# Altium PCB 3043-1-1532_Rev01.PcbDoc (part 2 of 2)
Units mm, origin at the board's own origin, x right, y up, seen from the top; angles counter-clockwise.
Board outline 98 x 98 mm, 4 copper layers (Top Layer, MidLayer1, MidLayer2, Bottom Layer); 167 components, 124 nets, 549 pads, 217 vias.
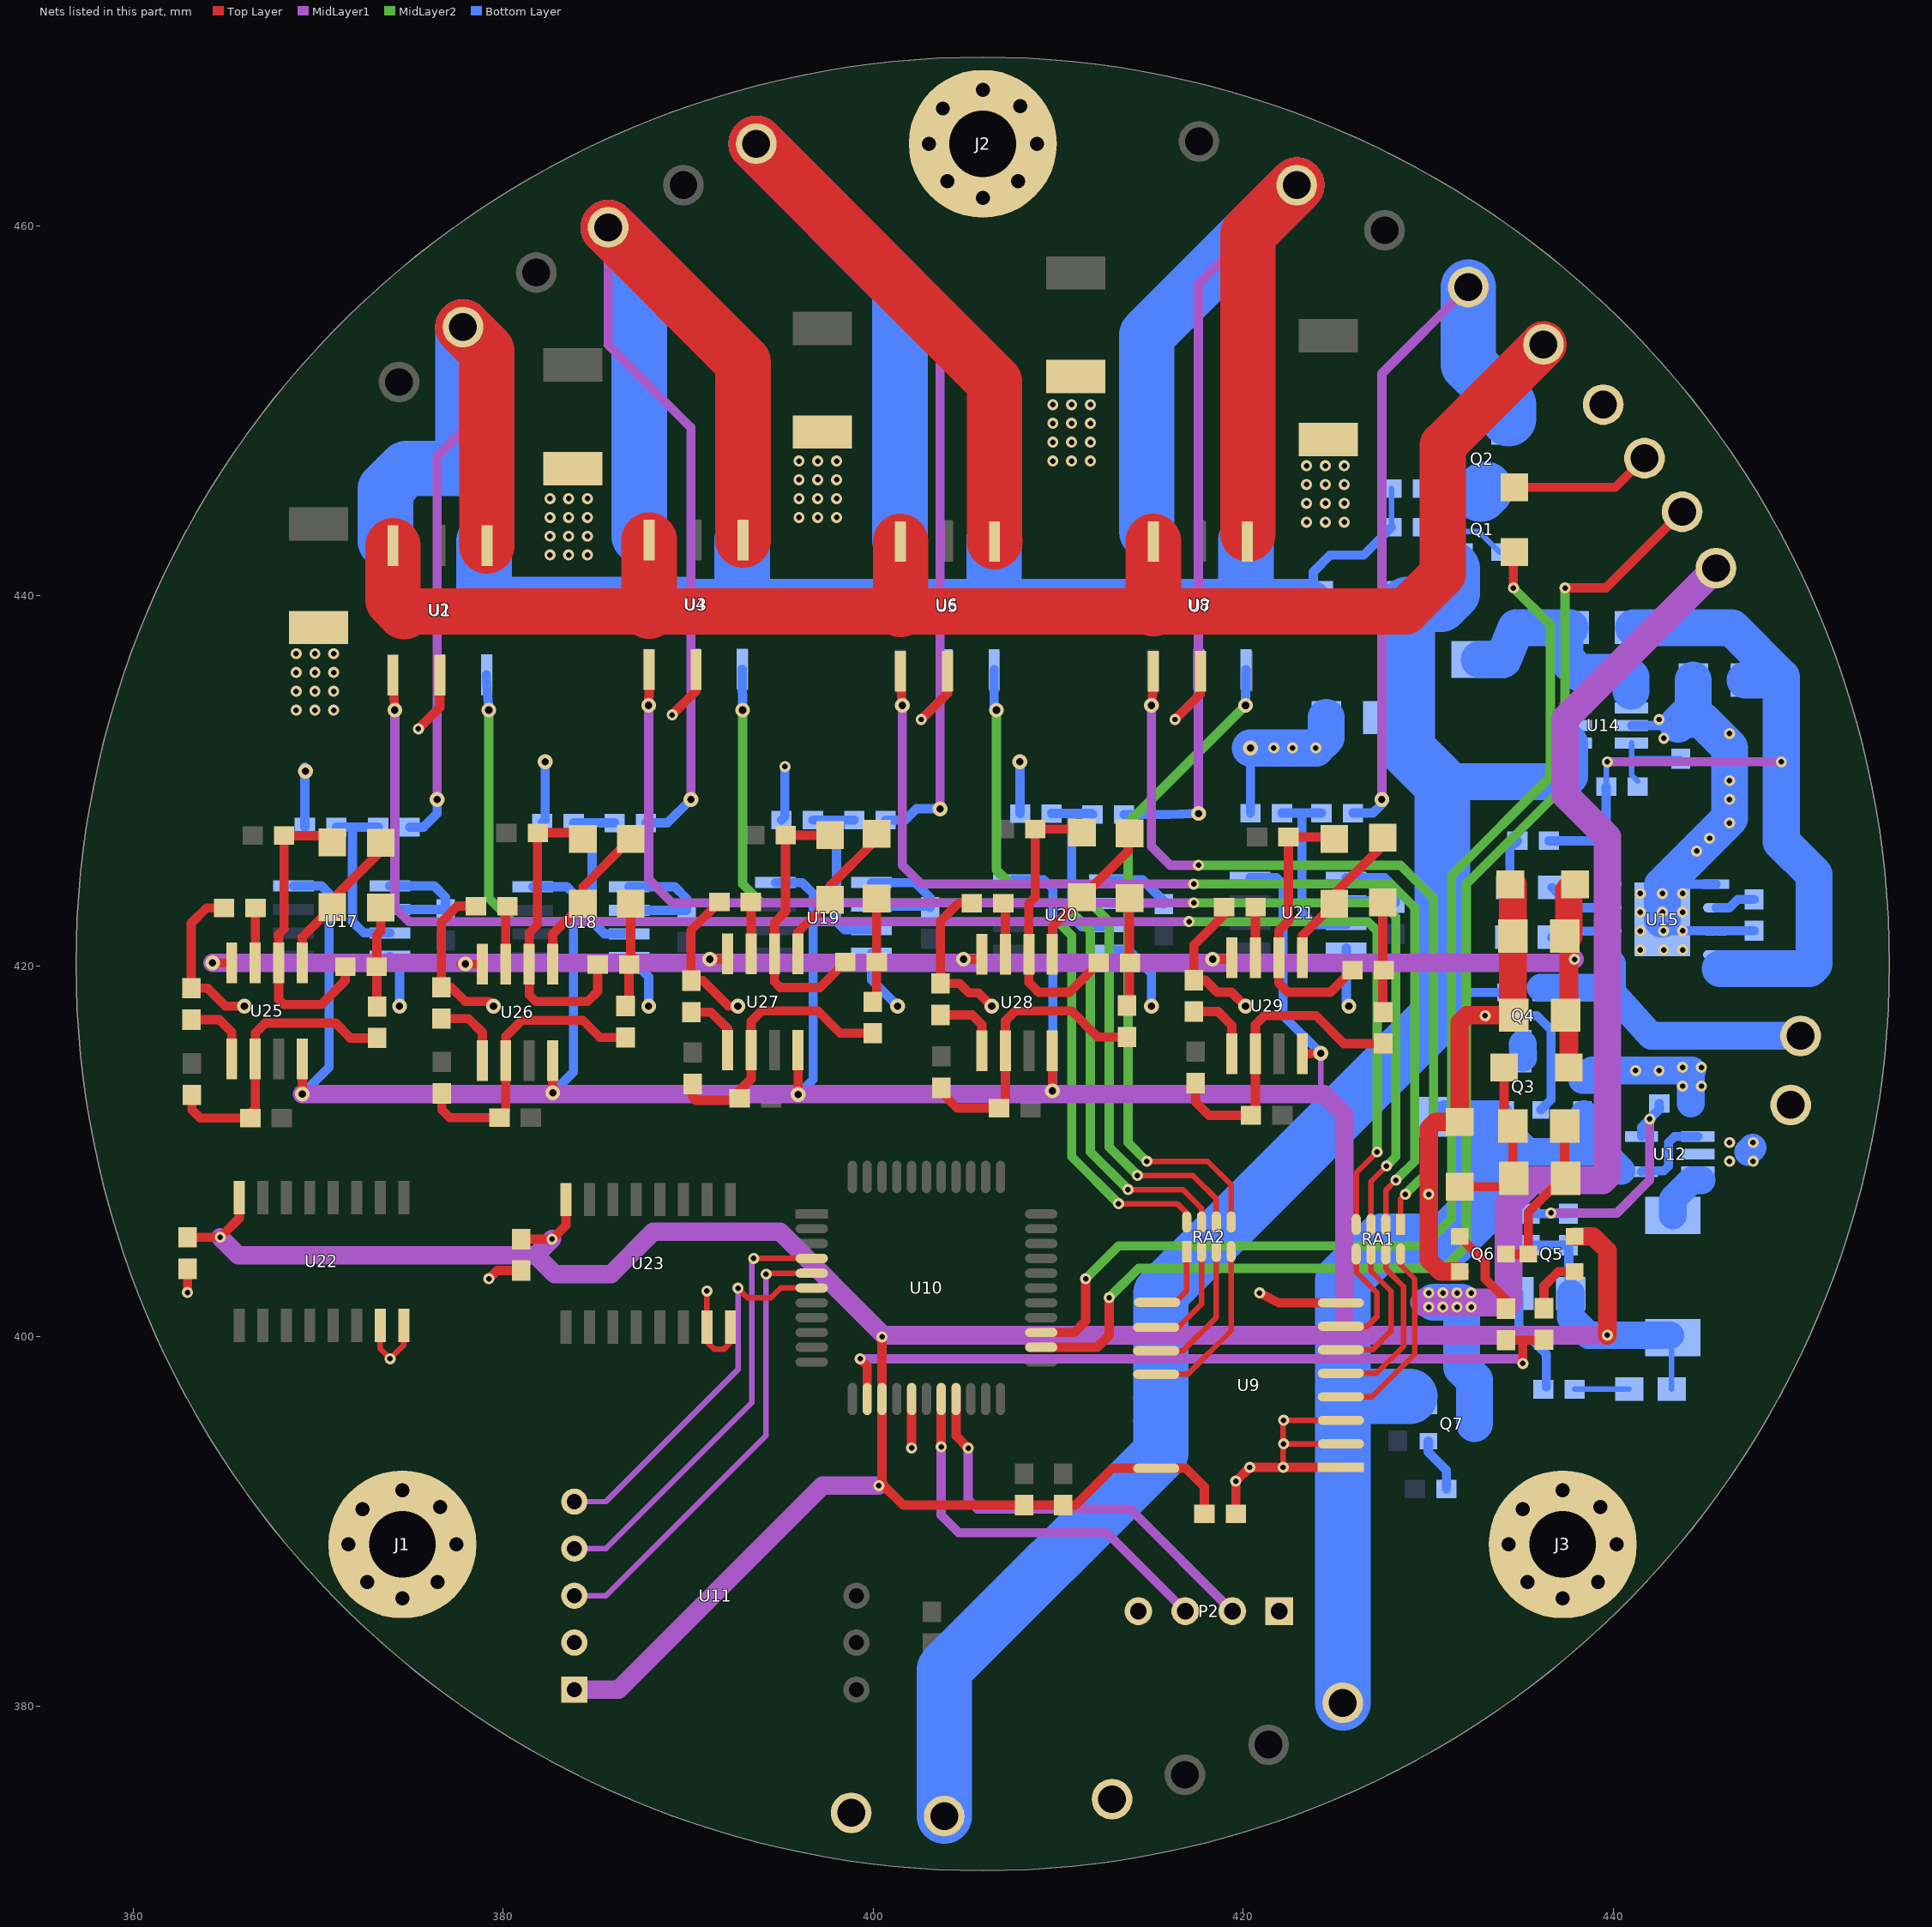
[diagram p4: the nets of this part, all layers, seen from the top]

## Via types
v1: diameter 0.6, hole 0.3, Top Layer to Bottom Layer, 175 vias
v2: diameter 0.8, hole 0.4, Top Layer to Bottom Layer, 42 vias

## Nets (pads, with @x,y where several pads share a name; then routed paths per layer and width w, separated by ;. In a path a pad name is that pad's centre, name@x,y a point inside that pad or via, vN(x,y) a via of type N, cw(c..) or ccw(c..) an arc to the next point about the centre after c; other vN are vias at no path point) (continued)
GND: -BATT.1 -CHG.1 -VOUT.1 C1.2 C2.2 C3.2 C5.2 C6.2 C9.2 C10.2 C11.2 C12.2 D5.2 D6.2 G.1 J1.1 J2.1 J3.1 P2.1 P2.4 Q6.2 R3.2 R4.2 R5.2 R6.2 R7.2 R12.2 R13.1 R15.2 R17.2 R28.1 R29.1 R34.1 R35.1 R38.1 R49.2 R50.2 R51.2 R52.2 R63.2 R64.2 R65.2 R66.2 R72.2 R73.2 U1.2 U2.2 U3.2 U4.2 U5.2 U6.2 U7.2 U8.2 U9.1 U9.2 U9.3 U9.8 U10.16 U11.2 U12.2 U14.2 U15.1 U15.3 U15.9 U17.4 U18.4 U19.4 U20.4 U21.4 U22.7 U22.8 U23.7 U23.8 | length 212.3
  Top Layer w0.3: U22.7@373.355,400.588 373.355,399.313 v1(373.888,398.78) 374.625,399.517 U22.8@374.625,400.588 ; v1(391.008,402.438) 391.008,399.694 391.414,399.288 391.922,399.288 392.278,399.644 U23.8@392.278,400.486 ; v1(422.148,392.913) v1@422.148,395.478 ; v1(422.173,394.183) U9.2@425.272,394.183 ; v1(422.173,395.453) U9.3@425.272,395.453
  Top Layer w0.5: v1(362.941,402.361) C11.2@362.941,403.645 ; R49.2@364.91,423.136 363.957,423.136 363.144,422.323 R51.2@363.144,418.804 364.024,418.804 364.998,417.83 v2(366.014,417.83) ; v1(375.412,432.816) 376.58,433.984 U1.2@376.58,435.712 ; R50.2@378.524,423.24 377.52,423.24 376.657,422.377 R52.2@376.657,418.858 377.178,418.858 377.952,418.084 379.222,418.084 v2(379.476,417.83) ; v1(379.222,403.098) 379.667,403.543 C12.2@380.975,403.543 ; v1(389.128,433.578) 390.423,434.873 U3.2@390.423,436.016 ; R65.2@390.144,419.1 390.144,421.931 R63.2@391.682,423.469 ; R65.2@390.169,419.213 390.793,419.213 392.176,417.83 v2(392.684,417.83) ; v1(402.072,393.964) U10.16@402.072,396.603 ; v1(402.59,433.324) 404.012,434.746 U5.2@404.012,435.94 ; R64.2@405.321,423.393 404.597,423.393 403.631,422.427 R66.2@403.631,419.061 404.661,419.061 405.169,418.553 405.677,418.553 v2(406.4,417.83) ; v1(416.306,433.324) 417.678,434.696 U7.2@417.678,435.94 ; R72.2@418.961,423.189 418.961,422.771 417.322,421.132 R73.2@417.322,419.239 417.945,419.239 418.592,418.592 419.354,418.592 v2(420.116,417.83) ; C1.2@419.594,390.398 v1(419.594,392.162) v1(420.345,392.913) U9.1@425.272,392.913 ; v1(420.878,402.336) 421.919,401.803 U9.8@425.272,401.803 ; C9.2@434.613,417.347 434.643,417.377 C9.2@434.643,417.398 ; C10.2@434.643,421.615 434.643,422.986
  Top Layer w1: Q6.2@431.693,403.482 430.654,403.482 430.022,404.114 430.022,411.226 430.375,411.579 D6.2@431.698,411.579 431.698,416.966 432.079,417.347 C9.2@434.613,417.347
  Top Layer w1.5: C9.2@434.563,417.398 D5.2@434.563,424.403
  Bottom Layer w0.5: R28.1@369.279,427.507 369.279,430.747 v2(369.316,430.53) ; U17.4@373.872,420.524 374.396,420 v2(374.396,417.83) ; v1(375.412,432.816) 376.555,433.959 U2.2@376.555,435.737 ; R29.1@382.106,427.736 382.27,427.9 v2(382.27,431.038) ; U18.4@386.8,420.472 387.858,419.414 v2(387.858,417.83) ; v1(389.128,433.578) 390.373,434.823 U4.2@390.373,436.042 ; R34.1@395.034,427.888 395.224,428.078 v1(395.224,430.784) ; U19.4@399.907,420.7 399.907,419.243 v2(401.32,417.83) ; v1(402.59,433.324) 403.987,434.721 U6.2@403.987,436.016 ; v2(407.924,431.038) 407.924,428.258 R35.1@407.938,428.244 ; U20.4@412.759,420.853 413.791,420.853 415.036,419.608 v2(415.036,417.83) ; v1(416.306,433.324) 417.601,434.619 U8.2@417.601,436.016 ; R38.1@420.384,428.269 v2(420.384,431.786) ; U21.4@425.561,420.98 425.561,417.973 v2(425.704,417.83) ; C3.2@434.893,402.311 434.893,400.513 436.372,399.034 R13.1@436.372,397.256 ; U14.2@440.981,433.004 443.536,433.004 R15.2@443.636,432.904 ; U15.9@442.468,422.148 v1(442.708,421.908) U15.3@445.546,421.908 ; U15.9@442.771,424.483 442.827,424.427 U15.1@445.546,424.427 ; U15.3@445.546,421.887 445.566,421.908 R17.2@447.599,421.908
  Bottom Layer w1.5: C2.2@438.746,413.854 C2.2@438.328,413.854 438.824,414.35 444.246,414.35 444.182,414.286 R12.2@444.182,412.572 ; 447.294,409.956 v1@447.523,410.185
  Bottom Layer w2: v2(420.384,431.786) v1(423.912,431.786) 424.479,432.353 C5.2@424.479,433.426 ; U15.9@442.646,422.522 442.646,424.358 446.278,427.99 446.278,431.8 444.754,433.324 444.246,433.324 ; R15.2@443.484,433.07 444.316,433.902 C6.2@444.316,435.458
  other v1: 430.022,407.67 446.278,409.448 447.548,409.448 446.278,410.464 447.548,410.464 443.738,413.512 444.754,413.512 441.198,414.35 442.468,414.35 443.738,414.528 444.754,414.528 433.07,417.322 441.452,420.878 442.722,420.878 443.738,420.878 441.452,421.894 443.738,421.908 441.452,422.91 442.646,422.91 443.738,422.91 441.452,423.926 442.646,423.926 443.738,423.926 444.5,426.212 445.193,426.905 446.278,427.736 446.278,429.006 446.278,430.022 421.64,431.786 422.656,431.786 442.722,432.308 446.278,432.562 442.468,433.324 368.808,433.832 369.824,433.832 370.84,433.832 368.808,434.848 369.824,434.848 370.84,434.848 368.808,435.864 369.824,435.864 370.84,435.864 368.808,436.88 369.824,436.88 370.84,436.88 382.524,442.214 383.54,442.214 384.556,442.214 382.524,443.23 383.54,443.23 384.556,443.23 423.418,443.992 424.434,443.992 425.45,443.992 382.524,444.246 383.54,444.246 384.556,444.246 395.986,444.246 397.002,444.246 398.018,444.246 423.418,445.008 424.434,445.008 425.45,445.008 382.524,445.262 383.54,445.262 384.556,445.262 395.986,445.262 397.002,445.262 398.018,445.262 423.418,446.024 424.434,446.024 425.45,446.024 395.986,446.278 397.002,446.278 398.018,446.278 423.418,447.04 424.434,447.04 425.45,447.04 395.986,447.294 397.002,447.294 398.018,447.294 409.702,447.294 410.718,447.294 411.734,447.294 409.702,448.31 410.718,448.31 411.734,448.31 409.702,449.326 410.718,449.326 411.734,449.326 409.702,450.342 410.718,450.342 411.734,450.342
MCU_485CON: U10.6 U11.5 | length 20.6
  Top Layer w0.3: v1(392.684,402.59) 393.192,402.082 394.462,402.082 394.983,402.603 U10.6@396.672,402.603
  MidLayer1 w0.3: U11.5@383.845,391.058 385.547,391.058 392.684,398.196 v1(392.684,402.59)
MCU_RXD: P2.3 U10.18 | length 21.6
  Top Layer w0.5: v1(403.672,394.02) U10.18@403.672,396.603
  MidLayer1 w0.5: v1(403.672,394.02) 403.672,390.332 404.622,389.382 412.623,389.382 P2.3@416.865,385.14
MCU_RXD2: U10.4 U11.4 | length 23.8
  Top Layer w0.3: v1(393.535,404.203) U10.4@396.672,404.203
  MidLayer1 w0.3: U11.4@383.845,388.518 385.547,388.518 393.446,396.418 393.446,404.114 v1(393.535,404.203)
MCU_RXD_2: RxD.1 U10.24 | length 72.2
  Top Layer w0.5: U10.24@409.072,399.403 412.103,399.403 412.75,400.05 v1(412.75,402.082) ; v1(437.388,440.436) 439.598,440.436 RxD.1@443.713,444.551
  MidLayer2 w0.5: v1(412.75,402.082) 414.336,403.668 430.846,403.668 432.054,404.876 432.054,424.434 437.388,429.768 v1(437.388,440.436)
MCU_TXD: P2.2 U10.19 | length 22.5
  Top Layer w0.5: U10.19@404.472,396.603 404.472,394.612 v1(405.13,393.954)
  MidLayer1 w0.5: v1(405.13,393.954) 405.13,391.16 405.638,390.652 413.893,390.652 P2.2@419.405,385.14
MCU_TXD2: U10.5 U11.3 | length 25.1
  Top Layer w0.3: v1(394.208,403.352) 394.259,403.403 U10.5@396.672,403.403
  MidLayer1 w0.3: U11.3@383.845,385.978 385.547,385.978 394.208,394.64 v1(394.208,403.352)
MCU_TXD_2: D17.2 TxD.1 | length 7.7
  Top Layer w0.5: D17.2@434.645,445.869 440.103,445.869 TxD.1@441.681,447.446
NEGA_PWM: R20.2 R22.2 U10.13 | length 41.5
  Top Layer w0.5: v1(399.288,398.78) 399.672,398.396 U10.13@399.672,396.603 ; R22.2@434.188,399.784 R20.2@436.22,399.784 ; v1(435.102,398.526) 435.102,399.784
  MidLayer1 w0.5: v1(399.288,398.78) 434.848,398.78 v1(435.102,398.526)
Net+BATT_1: +BATT.1 Q4.2 U15.5 | length 17
  Bottom Layer w1.5: Q4.2@436.077,418.826 439.694,418.826 442.036,416.23 +BATT.1@450.113,416.23 ; 439.922,418.344 439.922,420.122
NetC4_2: C4.2 R11.2 R12.1 U12.5 | length 13.6
  MidLayer1 w0.5: v1(436.626,406.654) 440.182,406.654 441.96,408.432 v1(441.96,411.734)
  Bottom Layer w0.5: C4.2@435.508,406.615 R11.2@437.566,406.615 ; U12.5@441.514,410.79 441.514,411.288 442.482,412.256 R12.1@442.482,412.572
NetC6_1: C6.1 D3.2 R14.1 R16.1 U15.4 U15.8 | length 51.3
  MidLayer1 w0.5: v1(439.674,431.038) v1(449.072,431.038)
  Bottom Layer w0.3: R14.1@439.611,429.997 439.611,430.975 v1(439.674,431.038)
  Bottom Layer w0.5: R16.1@436.511,426.771 439.115,426.771 439.746,426.14 U15.8@439.746,424.427 ; 439.611,426.275 R14.1@439.611,429.692
  Bottom Layer w2: D3.2@441.085,438.288 446.394,438.288 449.072,435.61 449.072,426.72 450.85,424.942 450.85,420.116 450.596,419.862 445.77,419.862 ; C6.1@447.116,435.458 448.716,435.458 448.818,435.356
NetC7_1: C7.1 C8.1 Q5.3 Q6.3 | length 8.9
  Top Layer w0.5: Q6.3@434.193,404.432 Q5.3@435.389,404.432 ; Q5.3@435.401,404.444 435.401,406.699 437.236,408.534 437.363,408.661 C8.1@437.363,411.353
NetC7_2: C7.2 C8.2 D4.2 D6.1 | length 9.3
  Top Layer w0.5: D6.1@431.698,408.079 434.241,408.079 434.563,408.401 C8.2@434.563,411.353 434.089,411.827 D4.2@434.089,414.528
NetD1_1: D1.1 R1.2 R2.2 U2.6 U4.6 U6.6 U8.6 | length 68.7
  Bottom Layer w0.3: D1.1@423.774,439.547 D1.1@423.774,440.69 ; R1.2@428.004,443.713 R2.2@428.004,445.795
  Bottom Layer w0.5: D1.1@423.774,440.69 423.774,441.3 424.688,442.214 426.505,442.214 R1.2@428.004,443.713
  Bottom Layer w3: U2.6@378.968,442.976 378.968,439.928 379.476,439.42 ; 379.359,439.537 389.773,439.537 ; 387.604,439.42 D1.1@423.418,439.42 ; 392.913,439.699 U4.6@392.913,443.042 ; 406.527,439.801 U6.6@406.527,443.016 ; 420.141,439.903 U8.6@420.141,443.016
NetD3_1: D3.1 L2.2 U14.1 | length 12.5
  Bottom Layer w2: L2.2@432.74,436.575 434.035,436.575 434.732,438.288 D3.1@437.656,438.288 ; D3.1@437.388,438.288 437.388,436.626 438.15,435.864 440.69,435.864 440.944,435.61 440.944,434.848
NetD7_1: D7.1 D9.2 U25.1 | length 8.2
  Top Layer w0.5: U25.1@369.138,420.173 369.138,421.564 D7.1@370.764,423.189 370.764,423.593 373.38,426.209 D9.2@373.38,426.664
NetD7_2: D7.2 R43.2 R45.1 U25.2 | length 16.9
  Top Layer w0.5: D7.2@370.764,426.689 370.406,427.048 R45.1@368.159,427.048 368.159,422.005 367.868,421.714 367.868,418.208 368.148,417.929 370.18,417.929 371.463,419.213 R43.2@371.463,420.164
NetD8_1: D8.1 D10.2 U26.1 | length 8.7
  Top Layer w0.5: U26.1@382.676,420.1 382.676,421.744 D8.1@384.302,423.37 ; D8.1@384.302,423.164 384.302,424.279 D10.2@386.893,426.87
NetD8_2: D8.2 R44.2 R46.1 U26.2 | length 17.2
  Top Layer w0.5: R46.1@381.85,427.304 381.85,422.236 381.406,421.792 381.406,418.44 381.762,418.084 384.556,418.084 385.103,418.631 R44.2@385.103,420.091 ; R46.1@381.875,427.203 D8.2@384.531,427.203
NetD9_1: D9.1 R43.1 R47.2 | length 5.4
  Top Layer w0.5: R47.2@373.177,417.814 373.177,421.688 373.38,421.891 D9.1@373.38,423.164
NetD10_1: D10.1 R44.1 R48.2 | length 5.4
  Top Layer w0.5: R48.2@386.803,417.855 R44.1@386.803,420.091 ; R44.1@386.893,420.18 D10.1@386.893,423.37
NetD11_1: D11.1 D13.2 U27.1 | length 7.9
  Top Layer w0.5: U27.1@395.935,420.659 395.935,421.846 D11.1@397.662,423.573 397.662,424.332 D13.2@400.177,426.847
NetD11_2: D11.2 R57.2 R59.1 U27.2 | length 15.1
  Top Layer w0.5: D11.2@397.662,427.073 395.264,427.073 R59.1@395.261,427.076 395.261,422.947 394.665,422.351 394.665,419.151 394.97,418.846 397.117,418.846 R57.2@398.489,420.218
NetD12_1: D12.1 D14.2 U28.1 | length 8.5
  Top Layer w0.5: U28.1@409.677,420.633 409.677,422.125 413.766,426.215 D14.2@413.766,427.482
NetD12_2: D12.2 R58.2 R60.1 U28.2 | length 15.7
  Top Layer w0.5: D12.2@411.277,427.225 411.096,427.406 R60.1@408.749,427.406 408.749,423.735 408.407,423.393 408.407,419.125 408.94,418.592 410.605,418.592 R58.2@412.179,420.167
NetD13_1: D13.1 R57.1 R61.2 | length 5.6
  Top Layer w0.5: R61.2@400.177,418.07 D13.1@400.177,423.649
NetD14_1: D14.1 R58.1 R62.2 | length 5.8
  Top Layer w0.5: R62.2@413.842,417.906 D14.1@413.842,423.675
NetD15_1: D15.1 D16.2 U29.1 | length 8.3
  Top Layer w0.5: U29.1@423.189,420.455 423.189,421.643 D15.1@424.917,423.37 424.917,423.901 427.533,426.517 D16.2@427.533,426.946
NetD15_2: D15.2 R69.2 R70.1 U29.2 | length 15
  Top Layer w0.5: D15.2@424.688,426.974 R70.1@422.439,426.974 422.439,422.439 421.919,421.919 421.919,419.075 422.402,418.592 424.702,418.592 R69.2@425.895,419.786
NetD16_1: D16.1 R69.1 R71.2 | length 5.9
  Top Layer w0.5: D16.1@427.533,423.446 427.533,417.537 R71.2@427.558,417.512
NetD17_1: D17.1 U10.25 | length 65.1
  Top Layer w0.5: U10.25@409.072,400.203 410.871,400.203 411.48,400.812 v1(411.48,403.098) ; v1(434.594,440.436) D17.1@434.594,442.318
  MidLayer2 w0.5: v1(411.48,403.098) 413.258,404.876 429.768,404.876 431.254,406.362 431.254,424.904 436.588,430.238 436.588,438.442 v1(434.594,440.436)
NetDS1_2: DS1.2 R13.2 | length 2.9
  Bottom Layer w0.3: R13.2@437.913,397.134 DS1.2@440.856,397.134
NetDS2_1: DS2.1 DS3.1 R16.2 | length 5.4
  Bottom Layer w0.5: DS2.1@434.39,424.251 DS3.1@434.377,421.559 DS3.1@434.402,421.584 ; DS2.1@434.402,424.251 434.402,426.362 R16.2@434.811,426.771
NetDS2_2: DS2.2 U15.7 | length 3.5
  Bottom Layer w0.5: DS2.2@436.688,424.251 437.782,423.157 U15.7@439.746,423.157
NetDS3_2: DS3.2 U15.6 | length 3.2
  Bottom Layer w0.5: DS3.2@436.663,421.559 436.991,421.887 U15.6@439.746,421.887
NetL1_1: L1.1 U12.3 | length 2.8
  Bottom Layer w1.5: L1.1@443.205,406.527 443.205,407.391 444.246,408.432 444.754,408.432
NetQ1_1: Q1.1 R1.1 | length 4.7
  Bottom Layer w0.3: R1.1@429.704,443.713 431.571,443.713 431.8,443.484 432.719,443.484 Q1.1@433.842,442.361
NetQ1_3: Q1.3 Q2.3 | length 0.4
  Bottom Layer w3: 432.816,445.516 Q2.3@433.07,445.77
NetQ2_1: Q2.1 R2.1 | length 3.8
  Bottom Layer w0.3: R2.1@429.704,445.795 429.704,446.214 431.942,448.452 Q2.1@431.942,448.646
NetQ3_3: Q3.3 Q4.3 | length 0.7
  Bottom Layer w1.5: Q4.3@435.102,415.798 Q3.3@435.127,415.061
NetQ5_1: Q5.1 R20.1 | length 3.2
  Top Layer w0.5: R20.1@436.245,401.51 436.245,402.717 437.022,403.494 Q5.1@437.901,403.494
NetQ6_1: Q6.1 R22.1 | length 4.9
  Top Layer w0.5: Q6.1@431.693,405.382 433.07,404.005 433.07,403.098 434.188,401.98 R22.1@434.188,401.484
NetQ7_1: Q7.1 R19.1 | length 3
  Bottom Layer w0.5: Q7.1@429.991,394.325 429.991,393.731 430.974,392.748 R19.1@430.974,391.744
NetR14_2: R14.2 R15.1 U14.3 | length 4.9
  Bottom Layer w0.3: 440.981,431.292 441.069,431.204 R15.1@443.636,431.204 ; U14.3@440.981,432.054 440.981,430.327 R14.2@441.311,429.997
NetR17_1: R17.1 U15.2 | length 2.2
  Bottom Layer w0.5: U15.2@445.546,423.157 446.271,423.157 446.722,423.608 R17.1@447.599,423.608
NetR24_1: R24.1 R28.2 U17.3 | length 9.6
  Bottom Layer w0.5: R28.2@370.979,427.507 R24.1@373.241,427.507 ; 371.856,427.507 371.856,422.402 372.464,421.794 U17.3@373.872,421.794
NetR25_1: R25.1 R29.2 U18.3 | length 9.8
  Bottom Layer w0.5: R29.2@383.806,427.736 R25.1@386.017,427.736 ; 384.81,427.736 384.81,422.402 385.47,421.742 U18.3@386.8,421.742
NetR26_1: R26.1 U17.1 U17.2 | length 6.9
  Bottom Layer w0.5: U17.2@373.872,423.064 376.875,423.064 R26.1@376.885,423.074 376.885,423.723 376.274,424.334 U17.1@373.872,424.334
NetR27_1: R27.1 U18.1 U18.2 | length 7.1
  Bottom Layer w0.5: U18.2@386.8,423.012 R27.1@389.902,423.012 ; U18.1@386.8,424.282 389.28,424.282 389.915,423.647 R27.1@389.915,422.998
NetR30_1: R30.1 R34.2 U19.3 | length 9.8
  Bottom Layer w0.5: R34.2@396.734,427.888 R30.1@398.971,427.888 ; 398.018,427.888 398.018,422.402 398.45,421.97 U19.3@399.907,421.97
NetR31_1: R31.1 R35.2 U20.3 | length 10.1
  Bottom Layer w0.5: R35.2@409.638,428.244 411.798,428.244 R31.1@411.849,428.193 ; 410.718,428.244 410.718,422.656 411.251,422.123 U20.3@412.759,422.123
NetR32_1: R32.1 U19.1 U19.2 | length 7.2
  Bottom Layer w0.5: U19.2@399.907,423.24 403.008,423.24 R32.1@403.073,423.176 403.073,423.697 402.26,424.51 U19.1@399.907,424.51
NetR33_1: R33.1 U20.1 U20.2 | length 6.5
  Bottom Layer w0.5: U20.2@412.759,423.393 415.657,423.393 R33.1@415.696,423.354 415.696,423.52 414.553,424.663 U20.1@412.759,424.663
NetR36_1: R36.1 R38.2 U21.3 | length 10.2
  Bottom Layer w0.5: R38.2@422.084,428.269 R36.1@424.219,428.269 ; 423.164,428.269 423.164,422.91 423.824,422.25 U21.3@425.561,422.25
NetR37_1: R37.1 U21.1 U21.2 | length 6.2
  Bottom Layer w0.5: U21.2@425.561,423.52 R37.1@428.129,423.52 ; U21.1@425.561,424.79 427.634,424.79 428.219,424.205 R37.1@428.219,423.43
NetR39_1: R39.1 R40.2 R47.1 U25.6 | length 16
  Top Layer w0.5: R39.1@363.169,413.04 363.169,412.239 363.626,411.782 R40.2@366.332,411.782 ; R40.2@366.116,411.833 366.598,412.316 366.598,416.38 367.132,416.913 370.942,416.913 371.741,416.114 R47.1@373.177,416.114
NetR41_1: R41.1 R42.2 R48.1 U26.6 | length 16.1
  Top Layer w0.5: R41.1@376.682,413.119 376.682,412.242 377.114,411.81 R42.2@379.794,411.81 380.136,412.152 380.136,416.204 381,417.068 384.302,417.068 385.228,416.142 R48.1@386.817,416.142
NetR49_1: R49.1 U25.3 | length 3
  Top Layer w0.5: U25.3@366.598,420.173 R49.1@366.598,423.124
NetR50_1: R50.1 U26.3 | length 3.1
  Top Layer w0.5: U26.3@380.136,420.1 R50.1@380.136,423.152
NetR51_1: R51.1 U25.5 | length 3.9
  Top Layer w0.5: R51.1@363.144,417.104 364.654,417.104 365.328,416.43 U25.5@365.328,414.973
NetR52_1: R52.1 U26.5 | length 4
  Top Layer w0.5: R52.1@376.657,417.158 378.116,417.158 378.866,416.408 U26.5@378.866,414.9
NetR53_1: R53.1 R54.2 R61.1 U27.6 | length 15.3
  Top Layer w0.5: R53.1@390.246,413.627 390.246,412.902 390.398,412.75 R54.2@392.774,412.75 ; R54.2@392.774,412.852 392.774,413.28 393.395,413.902 393.395,417.017 393.954,417.576 397.002,417.576 398.208,416.37 R61.1@400.177,416.37
NetR55_1: R55.1 R56.2 R62.1 U28.6 | length 16.2
  Top Layer w0.5: R55.1@403.682,413.424 403.682,413.182 404.546,412.318 R56.2@406.795,412.318 407.137,412.66 407.137,417.043 407.67,417.576 410.718,417.576 412.127,416.167 R62.1@413.918,416.167
NetR63_1: R63.1 U27.3 | length 2.8
  Top Layer w0.5: U27.3@393.395,420.659 R63.1@393.395,423.455
NetR64_1: R64.1 U28.3 | length 2.6
  Top Layer w0.5: U28.3@407.137,420.633 R64.1@407.137,423.277
NetR65_1: R65.1 U27.5 | length 3.5
  Top Layer w0.5: R65.1@390.169,417.513 391.223,417.513 392.125,416.611 U27.5@392.125,415.459
NetR66_1: R66.1 U28.5 | length 3.9
  Top Layer w0.5: R66.1@403.631,417.361 405.345,417.361 405.867,416.839 U28.5@405.867,415.433
NetR67_1: R67.1 R68.2 R71.1 U29.6 | length 17.4
  Top Layer w0.5: R67.1@417.424,413.678 417.424,412.648 418.135,411.937 R68.2@420.409,411.937 ; R68.2@420.116,411.734 420.649,412.267 420.649,416.839 421.132,417.322 423.926,417.322 425.436,415.812 R71.1@427.558,415.812
NetR72_1: R72.1 U29.3 | length 2.7
  Top Layer w0.5: U29.3@420.649,420.455 420.649,423.178 R72.1@420.661,423.189
NetR73_1: R73.1 U29.5 | length 3.9
  Top Layer w0.5: R73.1@417.322,417.539 418.629,417.539 419.379,416.789 U29.5@419.379,415.255
NetRA1_5: RA1.5 U9.7 | length 6
  Top Layer w0.3: U9.7@425.272,400.533 426.695,400.533 427.228,401.066 427.228,402.336 426.098,403.466 RA1.5@426.098,404.444
NetRA1_6: RA1.6 U9.6 | length 7.8
  Top Layer w0.3: U9.6@425.272,399.263 426.974,399.263 427.99,400.279 427.99,402.423 426.898,403.515 RA1.6@426.898,404.444
NetRA1_7: RA1.7 U9.5 | length 9.4
  Top Layer w0.3: U9.5@425.272,397.993 427.203,397.993 428.66,399.45 428.66,402.682 427.698,403.644 RA1.7@427.698,404.444
NetRA1_8: RA1.8 U9.4 | length 11
  Top Layer w0.3: U9.4@425.272,396.723 426.949,396.723 429.26,399.034 429.26,403.098 428.498,403.86 RA1.8@428.498,404.444
  Top Layer w0.5: RA1.8@428.498,404.114 RA1.8@428.498,404.444
NetRA2_1: RA2.1 U9.9 | length 4
  Top Layer w0.3: U9.9@415.341,401.828 416.306,401.828 416.941,402.463 RA2.1@416.941,404.571
NetRA2_2: RA2.2 U9.10 | length 5.8
  Top Layer w0.3: U9.10@415.29,400.482 416.484,400.482 417.741,401.739 RA2.2@417.741,404.571
NetRA2_3: RA2.3 U9.11 | length 7.6
  Top Layer w0.3: U9.11@415.29,399.212 416.738,399.212 418.541,401.015 RA2.3@418.541,404.571
NetRA2_4: RA2.4 U9.12 | length 9.3
  Top Layer w0.3: U9.12@415.29,397.942 416.992,397.942 419.341,400.291 RA2.4@419.341,404.571
S1_1: RA1.4 U1.1 | length 82.5
  Top Layer w0.3: RA1.4@426.098,406.044 426.098,408.826 v1(427.228,409.956)
  Top Layer w0.5: U1.1@374.04,435.712 374.04,435.204 v2(374.142,433.832)
  MidLayer1 w0.5: v2(374.142,433.832) 374.142,423.164 374.904,422.402 v1(417.068,422.402)
  MidLayer2 w0.5: v1(417.068,422.402) 426.72,422.402 427.228,421.894 v1(427.228,409.956)
S1_2: RA1.3 U3.1 | length 69.7
  Top Layer w0.3: RA1.3@426.898,406.044 426.898,408.356 v1(427.736,409.194)
  Top Layer w0.5: v2(387.858,434.086) 387.883,435.077 U3.1@387.883,436.016
  MidLayer1 w0.5: v2(387.858,434.086) 387.858,424.688 389.128,423.418 v1(417.322,423.418)
  MidLayer2 w0.5: v1(417.322,423.418) 427.482,423.418 428.244,422.656 428.244,409.702 v1(427.736,409.194)
S1_3: RA1.2 U5.1 | length 56.9
  Top Layer w0.3: RA1.2@427.698,406.044 427.698,407.886 v1(428.244,408.432)
  Top Layer w0.5: U5.1@401.472,435.94 401.472,435.204 v2(401.574,434.086)
  MidLayer1 w0.5: v2(401.574,434.086) 401.574,425.45 402.59,424.434 v1(417.322,424.434)
  MidLayer2 w0.5: v1(417.322,424.434) 427.99,424.434 429.26,423.164 429.26,409.448 v1(428.244,408.432)
S1_4: RA1.1 U7.1 | length 44.2
  Top Layer w0.3: RA1.1@428.498,406.044 428.498,407.416 v1(428.752,407.67)
  Top Layer w0.5: v2(415.036,434.086) 415.138,435 U7.1@415.138,435.94
  MidLayer1 w0.5: v2(415.036,434.086) 415.036,426.466 416.052,425.45 v1(417.576,425.45)
  MidLayer2 w0.5: v1(417.576,425.45) 428.498,425.45 430.276,423.672 430.276,409.194 v1(428.752,407.67)
S2_1: RA2.8 U2.1 | length 64.3
  Top Layer w0.3: v1(413.258,407.162) 416.433,407.162 416.941,406.654 RA2.8@416.941,406.171
  MidLayer2 w0.5: v2(379.222,433.832) 379.222,423.672 380.492,422.402 409.956,422.402 410.718,421.64 410.718,409.702 v1(413.258,407.162)
  Bottom Layer w0.5: U2.1@379.095,435.737 379.095,435.483 v2(379.222,433.832)
S2_2: RA2.7 U4.1 | length 51.4
  Top Layer w0.3: v1(413.766,407.924) 416.725,407.924 417.741,406.908 RA2.7@417.741,406.171
  MidLayer2 w0.5: v2(392.938,433.832) 392.938,424.434 393.954,423.418 410.21,423.418 411.734,421.894 411.734,409.956 v1(413.766,407.924)
  Bottom Layer w0.5: U4.1@392.913,436.042 392.913,435.635 v2(392.938,433.832)
S2_3: RA2.6 U6.1 | length 38.5
  Top Layer w0.3: v1(414.274,408.686) 417.271,408.686 418.541,407.416 RA2.6@418.541,406.171
  MidLayer2 w0.5: v2(406.654,433.832) 406.654,425.196 407.416,424.434 410.718,424.434 412.75,422.402 412.75,410.21 v1(414.274,408.686)
  Bottom Layer w0.5: U6.1@406.527,436.016 406.527,433.959 v2(406.654,433.832)
S2_4: RA2.5 U8.1 | length 36.7
  Top Layer w0.3: v1(414.782,409.448) 418.071,409.448 419.341,408.178 RA2.5@419.341,406.171
  MidLayer2 w0.5: v1(414.782,409.448) 413.766,410.464 413.766,427.736 v2(420.116,434.086)
  Bottom Layer w0.5: v2(420.116,434.086) 420.141,435.585 U8.1@420.141,436.016
V_BT1: +BT1.1 R24.2 U1.4 U2.4 | length 56.1
  Top Layer w3: +BT1.1@377.825,454.533 379.12,453.238 U1.4@379.12,442.712
  MidLayer1 w0.5: v2(376.428,429.006) 376.428,447.548 377.825,448.945 +BT1.1@377.825,454.533
  Bottom Layer w0.5: R24.2@374.941,427.507 375.691,427.507 376.428,428.244 v2(376.428,429.006)
  Bottom Layer w3: 373.634,442.976 373.634,445.77 374.761,446.897 377.809,446.897 377.825,446.913 +BT1.1@377.825,454.533
V_BT2: +BT2.1 R25.2 U3.4 U4.4 | length 73
  Top Layer w3: +BT2.1@385.674,459.918 392.963,452.628 U3.4@392.963,443.016
  MidLayer1 w0.5: +BT2.1@385.674,459.918 385.674,453.568 390.144,449.097 v2(390.144,429.006)
  Bottom Layer w0.5: R25.2@387.717,427.736 388.874,427.736 v2(390.144,429.006)
  Bottom Layer w3: +BT2.1@385.674,459.918 387.35,458.241 387.35,443.23
V_BT3: +BT3.1 R30.2 U5.4 U6.4 | length 94.8
  Top Layer w3: +BT3.1@393.675,464.439 406.552,451.561 U5.4@406.552,442.94 U5.4@406.578,442.966
  MidLayer1 w0.5: +BT3.1@393.675,464.439 403.606,454.508 v2(403.606,428.498)
  Bottom Layer w0.5: R30.2@400.671,427.888 401.726,427.888 402.336,428.498 v2(403.606,428.498)
  Bottom Layer w3: +BT3.1@393.675,464.439 401.447,456.667 U6.4@401.447,443.016
V_BT4: +BT4.1 R31.2 U7.4 U8.4 | length 82.2
  Top Layer w3: U7.4@420.243,443.357 420.243,459.562 +BT4.1@422.885,462.204
  MidLayer1 w0.5: v2(417.576,428.244) 417.576,456.895 +BT4.1@422.885,462.204
  Bottom Layer w0.5: R31.2@413.549,428.193 416.001,428.193 v2(417.576,428.244)
  Bottom Layer w3: U8.4@414.782,443.484 414.782,454.101 +BT4.1@422.885,462.204
V_BT5: +BT5.1 Q2.2 R36.2 | length 39.7
  MidLayer1 w0.5: v2(427.482,429.006) 427.482,452.018 +BT5.1@432.156,456.692
  Bottom Layer w0.5: R36.2@425.919,428.269 426.999,428.269 427.482,428.752 v2(427.482,429.006)
  Bottom Layer w3: +BT5.1@432.156,456.692 432.156,452.526 434.34,450.342 434.34,449.58
VCC_3V3: C1.1 C3.1 C4.1 C11.1 C12.1 DS1.1 L1.2 Q5.2 R8.1 R9.1 R11.1 U9.16 U10.14 U11.1 U17.8 U18.8 U19.8 U20.8 U21.8 U22.16 U23.16 U25.8 U26.8 U27.8 U28.8 U29.8 | length 305.1
  Top Layer w0.5: C11.1@362.941,405.345 v1(364.705,405.345) 365.735,406.375 U22.16@365.735,407.488 ; v2(369.138,413.08) U25.8@369.138,414.973 ; C12.1@380.975,405.243 v1(382.637,405.243) 383.388,405.994 U23.16@383.388,407.386 ; v2(382.676,413.156) U26.8@382.676,414.9 ; v2(395.935,413.055) U27.8@395.935,415.459 ; v1(400.472,399.964) 400.472,392.008 401.611,390.869 410.935,390.869 412.928,392.862 416.89,392.862 417.894,391.858 C1.1@417.894,390.398 ; v2(409.677,413.258) U28.8@409.677,415.433 ; U29.8@423.189,415.255 v2(424.18,415.29)
  Top Layer w1: Q5.2@437.901,405.394 438.902,405.394 439.674,404.622 v1(439.674,400.05)
  MidLayer1 w0.3: 424.18,413.08 v2(424.18,415.29)
  MidLayer1 w1: v1(364.705,405.345) 365.682,404.368 381.762,404.368 ; v2(369.138,413.08) 424.358,413.08 425.45,411.988 425.45,400.05 ; v1(382.637,405.243) 381.762,404.368 ; U11.1@383.845,380.898 386.232,380.898 397.256,391.922 v1(400.304,391.922) ; v1(439.674,400.05) 400.558,400.05 394.97,405.638 388.112,405.638 385.826,403.352 382.778,403.352 381.762,404.368
  Bottom Layer w0.3: DS1.1@443.142,397.134 L1.2@443.142,399.63
  Bottom Layer w0.5: U17.8@368.672,424.334 370.178,424.334 370.586,423.926 370.586,414.528 v2(369.138,413.08) ; U18.8@381.6,424.282 383.438,424.282 383.794,423.926 383.794,414.274 v2(382.676,413.156) ; U19.8@394.707,424.51 396.164,424.51 396.748,423.926 396.748,413.868 v2(395.935,413.055) ; U20.8@407.559,424.663 409.219,424.663 409.702,424.18 409.702,413.283 v2(409.677,413.258) ; U21.8@420.361,424.79 421.792,424.79 422.148,424.434 422.148,417.322 v2(424.18,415.29) ; C4.1@435.508,404.915 R11.1@437.566,404.915 C3.1@437.642,402.336
  Bottom Layer w1.5: C3.1@437.693,402.311 437.693,401.015 438.658,400.05 L1.2@443.078,400.05
VCC_-3V3: C9.1 C10.1 D4.1 D5.1 U25.4 U26.4 U27.4 U28.4 U29.4 | length 89.8
  Top Layer w0.5: v2(364.293,420.173) U25.4@365.328,420.173 ; v2(377.952,420.116) 377.714,420.1 U26.4@378.866,420.1 ; v2(391.16,420.37) 391.837,420.37 U27.4@392.125,420.659 ; v2(404.876,420.37) 405.603,420.37 U28.4@405.867,420.633 ; v2(418.338,420.37) 419.294,420.37 U29.4@419.379,420.455 ; U29.4@419.282,420.552 U29.4@419.354,420.624 ; D4.1@437.337,414.779 D4.1@437.589,414.528
  Top Layer w1: D4.1@437.589,414.528 C10.1@437.589,421.64
  Top Layer w1.5: C10.1@437.589,421.64 437.589,424.078 D5.1@437.919,424.409
  MidLayer1 w1: v2(364.293,420.173) 437.585,420.173 v1(437.896,420.37)
VCC_BAT: +VOUT.1 C5.1 D1.2 D2.1 L2.1 Q1.2 Q3.1 Q4.1 U14.4 U14.5 | length 108.7
  Bottom Layer w0.5: D2.1@430.759,417.906 D2.1@431.038,417.906 ; 430.784,418.414 430.942,418.572 Q4.1@434.177,418.572 434.177,417.993 434.848,417.322 435.864,417.322 436.626,416.56 436.626,412.785 Q3.1@436.077,412.237
  Bottom Layer w2: 428.854,433.476 D1.2@428.854,439.547 ; 430.581,429.971 437.337,429.971 437.642,430.276 U14.4@437.642,432.054
  Bottom Layer w3: +VOUT.1@403.835,374.066 403.835,381.991 415.544,393.7 415.544,402.336 430.784,417.576 430.784,418.414 ; 430.759,418.059 430.759,429.793 428.854,431.698 D1.2@428.854,439.547 430.657,439.547 431.292,440.182 431.292,441.452
VCC_CHARGE: +CHG.1 U1.6 U3.6 U5.6 U7.6 | length 86.5
  Top Layer w2.5: 374.65,439.166 428.752,439.166 430.784,441.198 430.784,448.158 +CHG.1@436.22,453.593
  Top Layer w3: U1.6@374.04,442.712 374.04,439.776 374.65,439.166 ; 387.883,439.191 U3.6@387.883,443.016 ; 401.472,439.268 U5.6@401.472,442.94 ; 415.138,439.318 U7.6@415.138,442.94
VCC_CTRL_5V: C2.1 D2.2 Q3.2 Q7.2 R18.1 U12.1 U12.4 V.1 | length 57.6
  Bottom Layer w0.5: U12.4@441.514,408.89 441.565,408.94 442.722,408.94 442.976,409.194 442.976,410.464 443.302,410.79 U12.1@444.562,410.79
  Bottom Layer w1.5: D2.2@430.759,411.861 430.886,411.988 Q3.2@433.832,411.988 ; 433.578,411.988 433.578,411.734 435.356,409.956 439.42,409.956 440.436,408.94 ; 438.404,409.956 C2.1@438.404,411.988
  Bottom Layer w3: V.1@425.374,380.187 425.374,403.022 427.482,405.13 431.038,405.13 432.816,406.908 432.816,410.972 ; 425.374,396.748 429.006,396.748
VCC_MPPT: Q7.3 VCC.1 | length 61.4
  MidLayer1 w1.5: 429.768,401.828 434.34,401.828 434.34,407.162 435.61,408.432 439.42,408.432 439.674,408.686 439.674,426.974 437.388,429.26 437.388,433.349 VCC.1@445.541,441.503
  Bottom Layer w2: 430.276,401.828 431.8,401.828 431.8,398.326 432.491,397.635 Q7.3@432.491,395.275
  other v1: 430.022,401.574 430.784,401.574 431.546,401.574 432.308,401.574 430.022,402.336 430.784,402.336 431.546,402.336 432.308,402.336
pads on no net: U1.3 U1.5 U2.3 U2.5 U3.3 U3.5 U4.3 U4.5 U5.3 U5.5 U6.3 U6.5 U7.3 U7.5 U8.3 U8.5 U9.13 U10.10 U10.11 U10.12 U10.15 U10.17 U10.20 U10.26 U10.27 U10.28 U10.29 U10.30 U10.31 U10.32 U10.33 U10.34 U10.35 U10.36 U10.37 U10.38 U10.39 U10.40 U10.41 U10.42 U10.43 U10.44 U11.10 U14.6 U17.5 U17.6 U17.7 U18.5 U18.6 U18.7 U19.5 U19.6 U19.7 U20.5 U20.6 U20.7 U21.5 U21.6 U21.7 U22.2 U22.4 U22.5 U23.2 U23.4 U23.5

## Polygon pours and split planes (outlines as drawn)
GND on Top Layer (solid, remove dead copper): 356.616,370.988 455.422,370.988 455.422,469.54 356.87,469.54 356.616,469.032
GND on Top Layer (solid, remove dead copper): 428.872,355.233 429.909,354.196 429.909,355.233
GND on Top Layer (solid, remove dead copper): 392.938,340.868 393.446,340.36 400.05,340.36 400.304,340.614 400.304,346.456 398.78,344.932 392.938,344.932
GND on Top Layer (solid, remove dead copper): 392.938,340.868 393.446,340.36 400.05,340.36 400.304,340.614 400.304,346.456 398.78,344.932 392.938,344.932
GND on Top Layer (solid, remove dead copper): 389.128,351.028 391.16,348.996 392.176,348.996 392.938,349.758 393.446,349.758 394.462,348.742 395.478,348.742 396.748,350.012 396.748,354.33
GND on Top Layer (solid, remove dead copper): 392.938,340.868 393.446,340.36 400.05,340.36 400.304,340.614 400.304,346.456 398.78,344.932 392.938,344.932
GND on Top Layer (solid, remove dead copper): 389.128,351.028 391.16,348.996 392.176,348.996 392.938,349.758 393.446,349.758 394.462,348.742 395.478,348.742 396.748,350.012 396.748,354.33
GND on Top Layer (solid, remove dead copper): 392.938,340.868 393.446,340.36 400.05,340.36 400.304,340.614 400.304,346.456 398.78,344.932 392.938,344.932
GND on Top Layer (solid, remove dead copper): 392.938,340.868 393.446,340.36 400.05,340.36 400.304,340.614 400.304,346.456 398.78,344.932 392.938,344.932
GND on Top Layer (solid, remove dead copper): 392.938,340.868 393.446,340.36 400.05,340.36 400.304,340.614 400.304,346.456 398.78,344.932 392.938,344.932
GND on Top Layer (solid, remove dead copper): 389.128,351.028 391.16,348.996 392.176,348.996 392.938,349.758 393.446,349.758 394.462,348.742 395.478,348.742 396.748,350.012 396.748,354.33
GND on MidLayer2 (solid, remove dead copper): 356.193,469.959 454.745,469.959 454.745,371.407 355.939,371.407 355.939,469.451
GND on Bottom Layer (solid, remove dead copper): 356.108,371.094 454.914,371.094 454.914,469.646 356.362,469.646 356.108,469.138

## Keep-outs
Keep-Out Layer:
  circle w0.254: c405.914,420.116 r49

## Text inside footprints (layer, text, board x,y; h text height)
U15: Bottom Overlay "1" at 445.041,425.773 h0.64